# EAGLE board single_channel_-_Rev_C_-_panel (EAGLE 6.1)
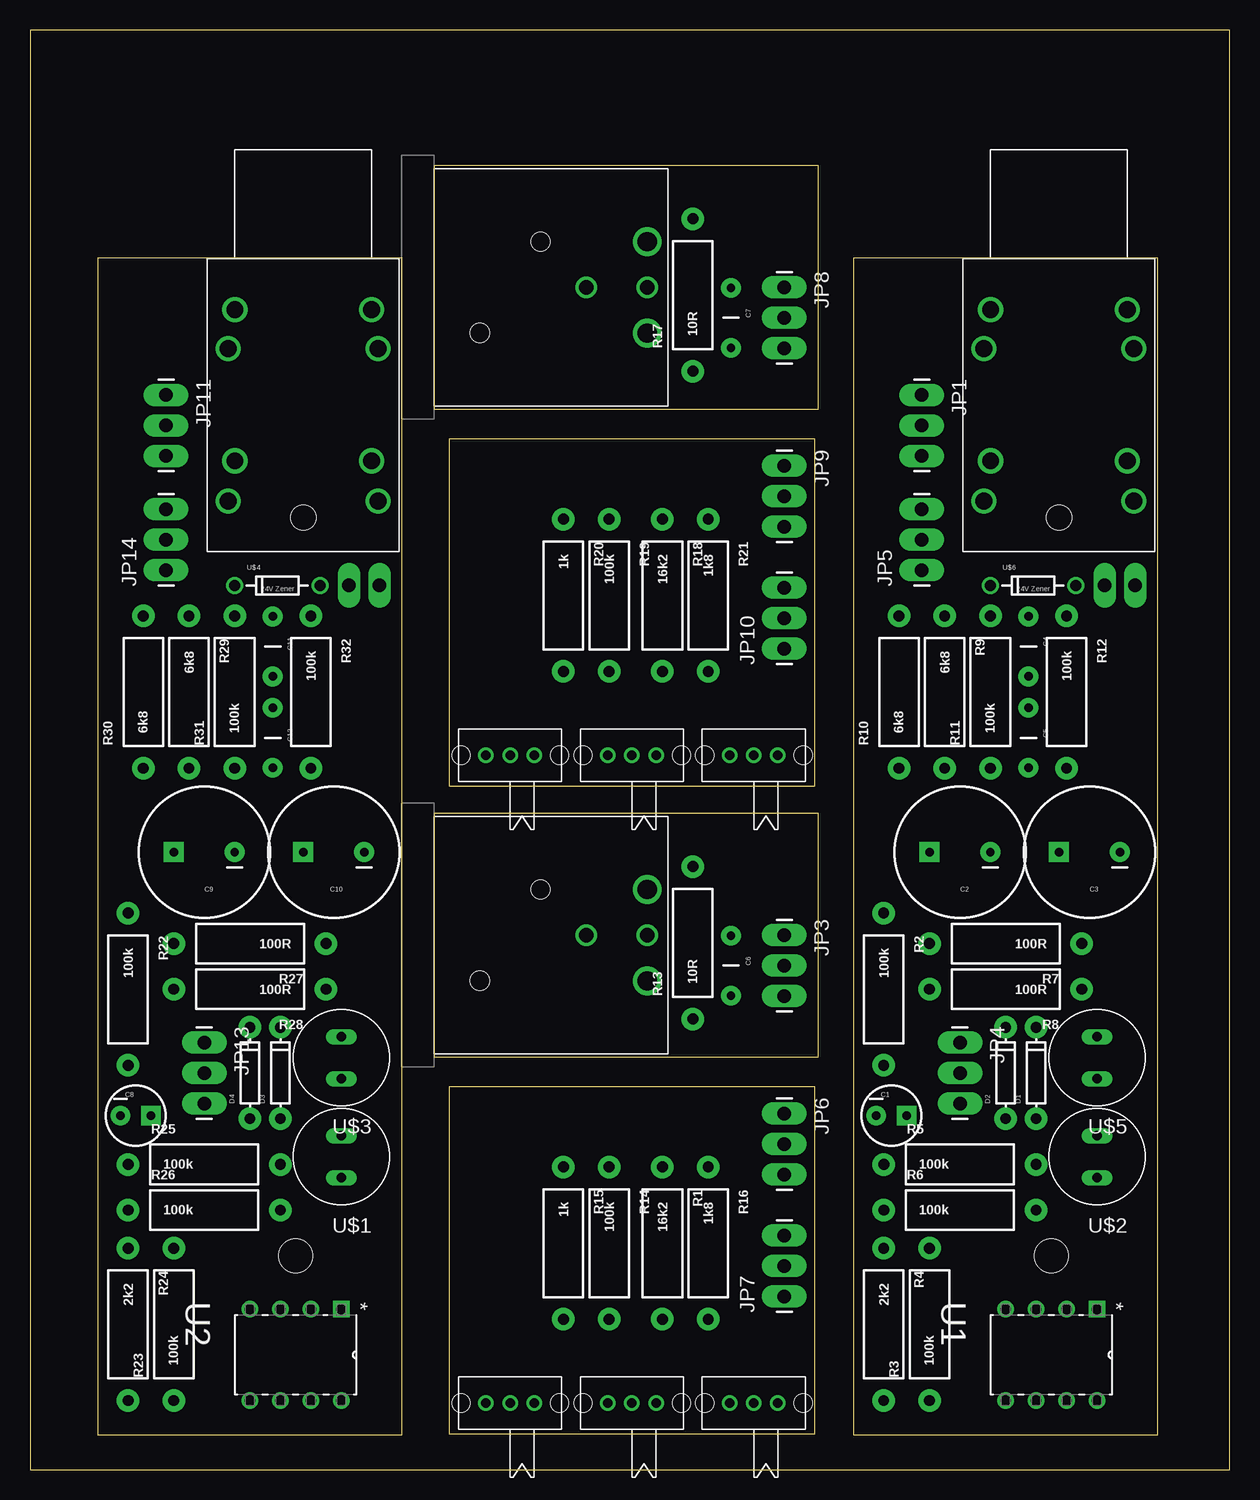
[diagram p0: board, top side]
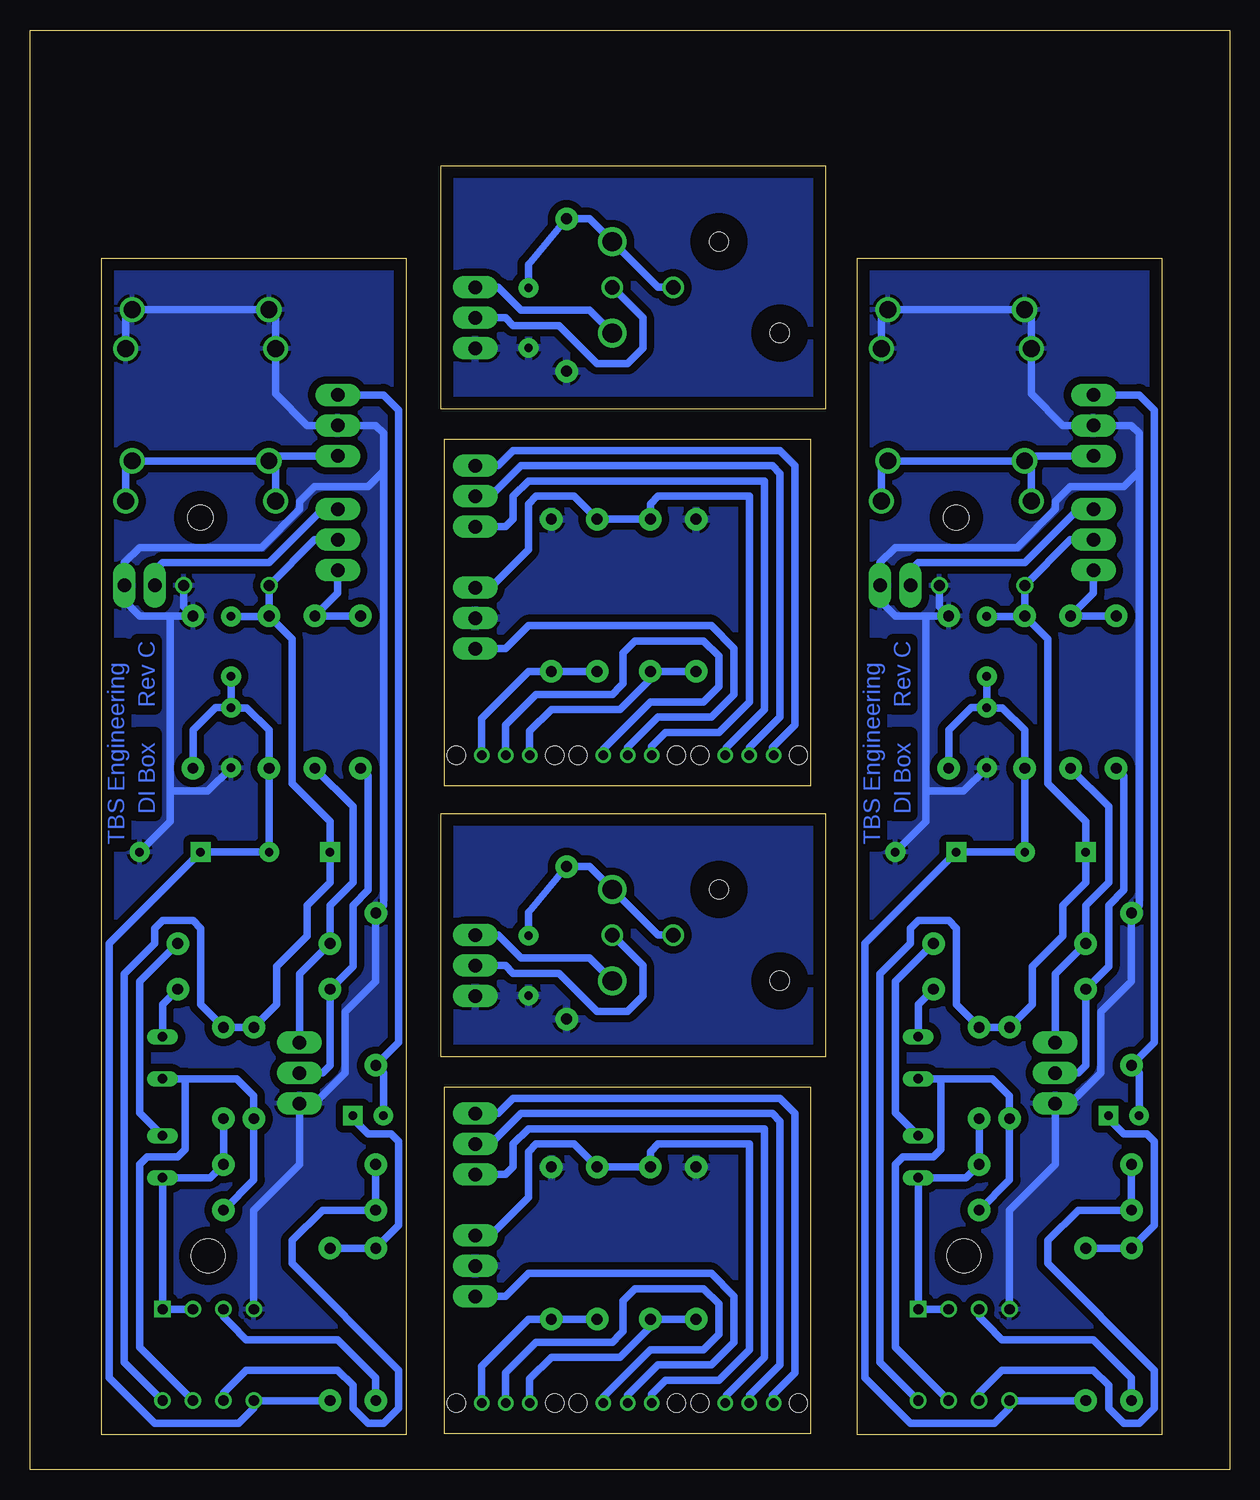
[diagram p1: board, bottom side, seen from below]

Size 100 x 120 mm. Coordinates in mm from the lower left corner, seen from the top.
Outline: 68.64,101 68.64,2.9 94.03,2.9 94.03,101 68.64,101
Outline: 33.67,34.38 65.73,34.38 65.73,54.7 33.67,54.7 33.67,34.38
Outline: 65.42,3 65.42,31.88 34.95,31.88 34.95,3 65.42,3
Outline: 0,0 100,0 100,120 0,120 0,0
Outline: 33.67,88.39 65.73,88.39 65.73,108.69 33.67,108.69 33.67,88.39
Outline: 65.42,57 65.42,85.88 34.95,85.88 34.95,57 65.42,57
Outline: 5.63,101 5.63,2.9 31.02,2.9 31.02,101 5.63,101
Copper layers (1*16): Top 0.035mm / dielectric 1.5mm / Bottom 0.035mm
Design rules: minimum track width 10mil, minimum drill 24mil, track to track 8mil, track to pad 8mil, pad to pad 8mil, via to via 8mil, smd to smd 8mil, copper to edge 40mil, drill to drill 8mil, minimum pad ring 10mil, minimum via ring 8mil, stop-mask expansion 4mil, vias tented up to drill 0mil, thermal gap 10mil
Holes 2.8 mm at 85.14,17.82 22.14,17.82
tKeepout: area 68.6,72.4 to 77.5,101; area 5.6,72.4 to 14.5,101

## Footprints (pad centres in the part's own frame; a part is rotated, then mirrored left to right if it is on the bottom)
CPOL-RADIAL-10UF-25V = drill 0.7 pad 1.651 square: 1 1.27,0 | drill 0.7 pad 1.651: 2 -1.27,0
CPOL-RADIAL-1000UF-25V = drill 0.7 pad 1.651 square: 1 2.54,0 | drill 0.7 pad 1.651: 2 -2.54,0
CAP-PTH-5MM = drill 0.7 pad 1.651: 1 -2.5,0; 2 2.5,0
DIODE-1N4148 = drill 0.9 pad 1.88: A -3.81,0; C 3.81,0
MHD = drill 1.4: 1 0,-5.7; 3 -12.6,-5.7; 4 0,5.7; 6 -12.6,5.7; 7 -3.25,-6.25; 9 -15.95,-6.25; 10 -3.25,6.25; 12 -15.95,6.25 | hole 2.1: -17.33,0
1X03_LONGPADS = drill 1.118 pad 1.88 long: 1 0,0; 2 2.54,0; 3 5.08,0
1X02_LONGPADS = drill 1.118 pad 1.88 long: 1 0,0; 2 2.54,0
AXIAL-0.5 = drill 0.9 pad 1.88: P$1 -6.35,0; P$2 6.35,0
SPDT-SLIDE = drill 0.787: 1 -2.007,0; 2 0,0; 3 2.007,0 | hole 1.499: -4.089,0; 4.115,0
DIP254P762X508-8 = drill 0.838 square: 1 -7.62,7.62 | drill 0.838: 2 -7.62,5.08; 3 -7.62,2.54; 4 -7.62,0; 5 0,0; 6 0,2.54; 7 0,5.08; 8 0,7.62
8MM = drill 0.8 long: P$1 0,1.75; P$2 0,-1.75
DIODE-ZENER = drill 0.9: P$1 -3.556,0; P$2 3.556,0
AC3MAH = drill 1.6: 1 3.81,-17.78; 2 -3.81,-17.78 | drill 1.2: 3 0,-17.78; G 0,-12.7 | hole 1.6: 3.81,-8.89; -3.81,-3.81

## Placement (x,y rotation side)
C1  [CPOL-RADIAL-10UF-25V]  71.81,29.5 0 top
C2  470uF  [CPOL-RADIAL-1000UF-25V]  77.53,51.47 180 top
C3  470uF  [CPOL-RADIAL-1000UF-25V]  88.32,51.47 180 top
C4  100nF  [CAP-PTH-5MM]  83.24,68.61 270 top
C5  100nF  [CAP-PTH-5MM]  83.24,60.99 270 top
C6  100nF  [CAP-PTH-5MM]  58.44,42.01 270 top
C7  100nF  [CAP-PTH-5MM]  58.44,96 270 top
C8  [CPOL-RADIAL-10UF-25V]  8.81,29.5 0 top
C9  470uF  [CPOL-RADIAL-1000UF-25V]  14.53,51.47 180 top
C10  470uF  [CPOL-RADIAL-1000UF-25V]  25.32,51.47 180 top
C11  100nF  [CAP-PTH-5MM]  20.24,68.61 270 top
C12  100nF  [CAP-PTH-5MM]  20.24,60.99 270 top
D1  [DIODE-1N4148]  83.88,33.05 90 top
D2  [DIODE-1N4148]  81.33,33.05 90 top
D3  [DIODE-1N4148]  20.88,33.05 90 top
D4  [DIODE-1N4148]  18.34,33.05 90 top
J1  ACJMMHD  [MHD]  85.78,96.68 90 top
J2  ACJMMHD  [MHD]  22.78,96.68 90 top
JP1  [1X03_LONGPADS]  74.35,89.57 270 top
JP2  [1X02_LONGPADS]  89.59,73.69 0 top
JP3  [1X03_LONGPADS]  62.88,44.55 270 top
JP4  [1X03_LONGPADS]  77.53,35.59 270 top
JP5  [1X03_LONGPADS]  74.35,74.97 90 top
JP6  [1X03_LONGPADS]  62.88,29.67 270 top
JP7  [1X03_LONGPADS]  62.88,14.43 90 top
JP8  [1X03_LONGPADS]  62.88,98.55 270 top
JP9  [1X03_LONGPADS]  62.88,83.67 270 top
JP10  [1X03_LONGPADS]  62.88,68.43 90 top
JP11  [1X03_LONGPADS]  11.35,89.57 270 top
JP12  [1X02_LONGPADS]  26.59,73.69 0 top
JP13  [1X03_LONGPADS]  14.53,35.59 270 top
JP14  [1X03_LONGPADS]  11.35,74.97 90 top
R1  16k2  [AXIAL-0.5]  52.73,18.88 270 top
R2  100k  [AXIAL-0.5]  71.17,40.04 270 top
R3  100k  [AXIAL-0.5]  74.98,12.1 90 top
R4  2k2  [AXIAL-0.5]  71.17,12.1 270 top
R5  100k  [AXIAL-0.5]  77.53,25.43 0 top
R6  100k  [AXIAL-0.5]  77.53,21.62 0 top
R7  100R  [AXIAL-0.5]  81.33,43.85 180 top
R8  100R  [AXIAL-0.5]  81.33,40.04 180 top
R9  6k8  [AXIAL-0.5]  76.25,64.81 270 top
R10  6k8  [AXIAL-0.5]  72.44,64.81 90 top
R11  100k  [AXIAL-0.5]  80.06,64.81 90 top
R12  100k  [AXIAL-0.5]  86.42,64.81 270 top
R13  10R  [AXIAL-0.5]  55.27,43.91 90 top
R14  100k  [AXIAL-0.5]  48.28,18.88 270 top
R15  1k  [AXIAL-0.5]  44.47,18.88 270 top
R16  1k8  [AXIAL-0.5]  56.53,18.88 270 top
R17  10R  [AXIAL-0.5]  55.27,97.91 90 top
R18  16k2  [AXIAL-0.5]  52.73,72.88 270 top
R19  100k  [AXIAL-0.5]  48.28,72.88 270 top
R20  1k  [AXIAL-0.5]  44.47,72.88 270 top
R21  1k8  [AXIAL-0.5]  56.53,72.88 270 top
R22  100k  [AXIAL-0.5]  8.18,40.04 270 top
R23  100k  [AXIAL-0.5]  11.98,12.1 90 top
R24  2k2  [AXIAL-0.5]  8.18,12.1 270 top
R25  100k  [AXIAL-0.5]  14.53,25.43 0 top
R26  100k  [AXIAL-0.5]  14.53,21.62 0 top
R27  100R  [AXIAL-0.5]  18.34,43.85 180 top
R28  100R  [AXIAL-0.5]  18.34,40.04 180 top
R29  6k8  [AXIAL-0.5]  13.26,64.81 270 top
R30  6k8  [AXIAL-0.5]  9.45,64.81 90 top
R31  100k  [AXIAL-0.5]  17.07,64.81 90 top
R32  100k  [AXIAL-0.5]  23.41,64.81 270 top
S1  SPDT  [SPDT-SLIDE]  60.34,5.54 0 top
S2  SPDT  [SPDT-SLIDE]  50.19,5.54 0 top
S3  SPDT  [SPDT-SLIDE]  40.02,5.54 0 top
S4  SPDT  [SPDT-SLIDE]  60.34,59.54 0 top
S5  SPDT  [SPDT-SLIDE]  50.19,59.54 0 top
S6  SPDT  [SPDT-SLIDE]  40.02,59.54 0 top
U1  TL072CP  [DIP254P762X508-8]  81.33,5.75 270 top
U2  TL072CP  [DIP254P762X508-8]  18.34,5.75 270 top
U$1  22uF  [8MM]  25.95,26.07 180 top
U$2  22uF  [8MM]  88.95,26.07 180 top
U$3  22uF  [8MM]  25.95,34.33 180 top
U$4  24V Zener  [DIODE-ZENER]  20.62,73.69 0 top
U$5  22uF  [8MM]  88.95,34.33 180 top
U$6  24V Zener  [DIODE-ZENER]  83.62,73.69 0 top
XLR1  AC3M  [AC3MAH]  33.67,44.55 90 top
XLR2  AC3M  [AC3MAH]  33.67,98.55 90 top

## Library data of the parts
C1 C4-C8 C11 C12 D1-D4 R1-R32 U$4 U$6 = SparkFun
C2 C3 C9 C10 = SparkFun-Passives
J1 J2 XLR1 XLR2 = con-audio
JP1-JP14 = SparkFun-Connectors
S1-S6 = switches
U1 U2 = ic-amplifiers; DESCRIPTION: OPERATIONAL AMPLIFIER; MPN: TL072CP; OC_FARNELL: 1106015; OC_NEWARK: 60K6988; PACKAGE: PDIP; SUPPLIER: Texas Instruments
U$1-U$3 U$5 = passive-capacitors

## Nets
1: JP6.1 S3.1
2: JP6.3 S3.3
3: JP9.1 S6.1
4: JP9.3 S6.3
GND: C3.2 C5.2 J1.1 J1.4 J1.7 J1.10 JP1.2 JP2.2 JP4.3 R2.P$1 R12.P$1 U1.4 U$6.P$2
GND1: C6.2 JP3.3 R13.P$1
GND2: JP7.2 R15.P$1 R16.P$1
GND3: C7.2 JP8.3 R17.P$1
GND4: JP10.2 R20.P$1 R21.P$1
GND5: C10.2 C12.2 J2.1 J2.4 J2.7 J2.10 JP11.2 JP12.2 JP13.3 R22.P$1 R32.P$1 U2.4 U$4.P$2
IN: JP7.3 R1.P$1 R14.P$1 S2.1
IN1: JP10.3 R18.P$1 R19.P$1 S5.1
MID: JP6.2 S3.2
MID1: JP9.2 S6.2
N$1: C6.1 R13.P$2 XLR1.1 XLR1.G
N$2: J1.3 J1.6 J1.9 J1.12 JP1.3
N$3: JP3.1 XLR1.2
N$4: JP3.2 XLR1.3
N$5: C1.2 JP1.1 R2.P$2
N$6: C1.1 R3.P$2 R4.P$1
N$7: D1.A R5.P$2 U1.1 U1.2 U$2.P$1
N$8: R4.P$2 U1.3
N$9: R5.P$1 R6.P$1 U1.6
N$10: C2.2 C3.1 C4.2 C5.1 R3.P$1 R11.P$1 R12.P$2 U1.5
N$11: C2.1 C4.1 D1.C D2.C JP5.2 R11.P$2 U1.8 U$6.P$1
N$12: D2.A R6.P$2 U1.7 U$5.P$1
N$13: JP4.2 R8.P$2 R10.P$1
N$14: JP5.1 R9.P$1 R10.P$2
N$15: JP4.1 R7.P$2 R9.P$2
N$16: R7.P$1 U$2.P$2
N$17: R8.P$1 U$5.P$2
N$18: R14.P$2 R15.P$2 S1.1
N$19: JP2.1 JP5.3
N$20: R1.P$2 R16.P$2 S1.3
N$21: S1.2 S2.3
N$22: C7.1 R17.P$2 XLR2.1 XLR2.G
N$23: JP8.2 XLR2.3
N$24: JP8.1 XLR2.2
N$25: R19.P$2 R20.P$2 S4.1
N$26: R18.P$2 R21.P$2 S4.3
N$27: S4.2 S5.3
N$28: J2.3 J2.6 J2.9 J2.12 JP11.3
N$29: C8.2 JP11.1 R22.P$2
N$30: C8.1 R23.P$2 R24.P$1
N$31: D3.A R25.P$2 U2.1 U2.2 U$1.P$1
N$32: R24.P$2 U2.3
N$33: R25.P$1 R26.P$1 U2.6
N$34: C9.2 C10.1 C11.2 C12.1 R23.P$1 R31.P$1 R32.P$2 U2.5
N$35: C9.1 C11.1 D3.C D4.C JP14.2 R31.P$2 U2.8 U$4.P$1
N$36: D4.A R26.P$2 U2.7 U$3.P$1
N$37: JP13.2 R28.P$2 R30.P$1
N$38: JP14.1 R29.P$1 R30.P$2
N$39: JP13.1 R27.P$2 R29.P$2
N$40: R27.P$1 U$1.P$2
N$41: R28.P$1 U$3.P$2
N$42: JP12.1 JP14.3
OUT: JP7.1 S2.2
OUT1: JP10.1 S5.2

## Tracks (layer width: path | path; a pad name or v marks a point on that pad's centre or on a via)
1
  Bottom 0.61: JP6.1 60.98,29.67 59.71,30.94 37.48,30.94 36.22,29.67 36.22,8.08 37.48,6.81 38.12,6.17 38.12,5.64 S3.1
2
  Bottom 0.61: JP6.3 60.34,24.59 59.71,25.23 59.71,27.13 58.44,28.4 38.76,28.4 38.76,9.35 41.93,6.17 41.93,5.64 S3.3
3
  Bottom 0.61: JP9.1 60.98,83.67 59.71,84.94 37.48,84.94 36.22,83.67 36.22,62.08 37.48,60.81 38.12,60.17 38.12,59.64 S6.1
4
  Bottom 0.61: JP9.3 60.34,78.59 59.71,79.22 59.71,81.13 58.44,82.4 38.76,82.4 38.76,63.35 41.93,60.17 41.93,59.64 S6.3
GND
  Bottom 0.61: 70.54,83.22 70.54,86.39 71.17,87.03 JP1.2 76.89,87.03 79.53,89.67 J1.10 79.53,96.13 J1.4 J1.1 92.03,96.13 J1.7 | 70.54,83.22 70.54,48.3 70.54,47.02 R2.P$1 71.17,40.67 73.72,38.13 73.72,33.05 76.25,30.52 JP4.3 77.53,25.43 81.33,21.62 U1.4 | 70.54,83.22 71.81,81.95 76.25,81.95 77.53,80.68 77.53,80.05 80.7,76.87 90.86,76.87 92.13,75.6 JP2.2 92.13,72.42 90.86,71.16 88.32,71.16 | U$6.P$2 87.18,71.92 R12.P$1 88.32,71.16 | C3.2 88.32,54.01 88.32,56.55 | 88.32,56.55 88.32,71.16 | C5.2 85.19,56.55 88.32,56.55
  pour Bottom (isolate 0.61): 68.64,101 68.64,3.21 94.03,3.21 94.03,101
GND1
  pour Bottom (isolate 0.61): 33.67,34.38 65.42,34.38 65.42,54.7 33.67,54.7
GND2
  pour Bottom (isolate 0.61): 65.42,3 65.42,32.21 34.95,32.21 34.95,3
GND3
  pour Bottom (isolate 0.61): 33.67,88.39 65.42,88.39 65.42,108.7 33.67,108.7
GND4
  pour Bottom (isolate 0.61): 65.42,57 65.42,86.21 34.95,86.21 34.95,57
GND5
  Bottom 0.61: 7.54,83.22 7.54,86.39 8.18,87.03 JP11.2 13.89,87.03 16.53,89.67 J2.10 16.53,96.13 J2.4 J2.1 29.03,96.13 J2.7 | 7.54,83.22 7.54,48.3 7.54,47.02 R22.P$1 8.18,40.67 10.71,38.13 10.71,33.05 13.26,30.52 JP13.3 14.53,25.43 18.34,21.62 U2.4 | 7.54,83.22 8.81,81.95 13.26,81.95 14.53,80.68 14.53,80.05 17.7,76.87 27.86,76.87 29.13,75.6 JP12.2 29.13,72.42 27.86,71.16 25.32,71.16 | U$4.P$2 24.18,71.92 R32.P$1 25.32,71.16 | C10.2 25.32,54.01 25.32,56.55 | 25.32,56.55 25.32,71.16 | C12.2 22.18,56.55 25.32,56.55
  pour Bottom (isolate 0.61): 5.63,101 5.63,3.21 31.04,3.21 31.04,101
IN
  Bottom 0.61: JP7.3 61.62,19.51 59.08,22.05 58.44,22.68 58.44,26.5 57.8,27.13 54.63,27.13 R1.P$1 R14.P$1 48.28,26.5 47.65,27.13 40.02,27.13 40.02,9.98 42.56,7.45 47.01,7.45 48.18,6.28 S2.1
IN1
  Bottom 0.61: JP10.3 61.62,73.51 59.08,76.05 58.44,76.69 58.44,80.5 57.8,81.13 54.63,81.13 R18.P$1 R19.P$1 48.28,80.5 47.65,81.13 40.02,81.13 40.02,63.98 42.56,61.45 47.01,61.45 48.18,60.28 S5.1
MID
  Bottom 0.61: JP6.2 61.62,27.13 59.08,29.67 38.12,29.67 37.48,29.04 37.48,8.71 40.02,6.17 S3.2
MID1
  Bottom 0.61: JP9.2 61.62,81.13 59.08,83.67 38.12,83.67 37.48,83.03 37.48,62.72 40.02,60.17 S6.2
N$1
  Bottom 0.61: XLR1.G 47.65,44.55 XLR1.1 53.36,50.26 R13.P$2 58.44,46.45 C6.1
N$2
  Bottom 0.61: J1.12 79.53,83.53 J1.6 | J1.9 92.03,83.53 J1.3 J1.6 | J1.6 79.67,84.49 JP1.3
N$3
  Bottom 0.61: XLR1.2 53.36,42.64 59.08,42.64 60.98,44.55 JP3.1
N$4
  Bottom 0.61: XLR1.3 48.91,42.01 48.91,39.47 50.19,38.2 52.73,38.2 55.9,41.37 59.71,41.37 60.34,42.01 JP3.2
N$5
  Bottom 0.61: JP1.1 70.54,89.57 69.27,88.3 69.27,48.93 69.27,35.59 R2.P$2 70.54,33.05 C1.2
N$6
  Bottom 0.61: C1.1 73.08,29.25 71.81,27.98 69.91,27.98 69.27,27.34 69.27,20.36 R4.P$1 R3.P$2
N$7
  Bottom 0.61: U1.2 U1.1 U$2.P$1 84.99,24.32 R5.P$2 D1.A
N$8
  Bottom 0.61: U1.3 83.88,12.73 83.24,12.1 81.97,10.83 74.35,10.83 71.17,7.66 R4.P$2
N$9
  Bottom 0.61: U1.6 83.88,6.38 81.97,8.29 74.35,8.29 73.08,7.02 73.08,5.12 71.81,3.85 70.54,3.85 69.27,5.12 69.27,8.29 78.16,17.18 78.16,19.09 75.62,21.62 R6.P$1 R5.P$1
N$10
  Bottom 0.61: C4.2 C5.1 | R12.P$2 86.42,61.63 84.51,63.53 83.28,63.53 C5.1 | C5.1 81.93,63.49 80.06,61.63 R11.P$1 C2.2 C3.1 93.4,43.85 93.4,7.66 89.59,3.85 82.61,3.85 81.33,5.12 U1.5 80.7,5.75 R3.P$1
N$11
  Bottom 0.61: JP5.2 76.25,77.5 U$6.P$1 R11.P$2 | C4.1 80.11,71.11 R11.P$2 | R11.P$2 78.16,69.25 78.16,57.19 74.98,54.01 C2.1 74.98,48.93 76.89,47.02 76.89,44.48 79.43,41.95 79.43,38.77 D2.C D1.C 85.78,38.77 85.78,45.12 86.42,45.76 88.95,45.76 89.59,45.12 89.59,44.48 89.59,43.85 92.13,41.31 92.13,40.67 92.13,8.93 U1.8
N$12
  Bottom 0.61: U$5.P$1 87.05,32.58 | 87.05,32.58 82.76,32.58 81.33,31.15 D2.A 81.33,24.16 R6.P$2 | U1.7 90.86,10.2 90.86,25.43 90.22,26.07 87.69,26.07 87.05,26.7 87.05,32.58
N$13
  Bottom 0.61: R10.P$1 71.81,57.82 71.81,48.3 73.08,47.02 73.08,41.95 R8.P$2 74.98,33.69 75.62,33.05 JP4.2
N$14
  Bottom 0.61: R10.P$2 R9.P$1 74.35,73.06 JP5.1
N$15
  Bottom 0.61: R9.P$2 73.08,55.28 73.08,48.93 74.98,47.02 R7.P$2 77.53,41.31 JP4.1
N$16
  Bottom 0.61: R7.P$1 90.86,40.67 90.86,31.15 90.86,29.73 U$2.P$2
N$17
  Bottom 0.61: U$5.P$2 88.95,38.77 R8.P$1
N$18
  Bottom 0.61: S1.1 58.34,7.55 56.53,9.35 50.82,9.35 48.28,11.89 R14.P$2 R15.P$2
N$19
  Bottom 0.61: JP2.1 89.59,74.97 88.95,75.6 80.06,75.6 75.62,80.05 JP5.3
N$20
  Bottom 0.61: S1.3 62.35,8.61 58.44,12.53 R16.P$2 R1.P$2
N$21
  Bottom 0.61: S1.2 60.34,8.08 57.8,10.62 51.45,10.62 50.82,11.26 50.57,11.51 50.57,14.05 50.19,14.43 49.55,15.06 43.84,15.06 42.56,13.79 42.56,11.26 43.84,9.98 48.28,9.98 52.19,6.07 S2.3
N$22
  Bottom 0.61: XLR2.G 47.65,98.55 XLR2.1 53.36,104.26 R17.P$2 58.44,100.45 C7.1
N$23
  Bottom 0.61: XLR2.3 48.91,96 48.91,93.47 50.19,92.19 52.73,92.19 55.9,95.37 59.71,95.37 60.34,96 JP8.2
N$24
  Bottom 0.61: XLR2.2 53.36,96.64 59.08,96.64 60.98,98.55 JP8.1
N$25
  Bottom 0.61: S4.1 58.34,61.55 56.53,63.35 50.82,63.35 48.28,65.89 R19.P$2 R20.P$2
N$26
  Bottom 0.61: S4.3 62.35,62.61 58.44,66.53 R21.P$2 R18.P$2
N$27
  Bottom 0.61: S4.2 60.34,62.08 57.8,64.62 51.45,64.62 50.82,65.25 50.57,65.51 50.57,68.05 50.19,68.43 49.55,69.06 43.84,69.06 42.56,67.8 42.56,65.25 43.84,63.98 48.28,63.98 52.19,60.07 S5.3
N$28
  Bottom 0.61: J2.12 16.53,83.53 J2.6 | J2.9 29.03,83.53 J2.3 J2.6 | J2.6 16.67,84.49 JP11.3
N$29
  Bottom 0.61: JP11.1 7.54,89.57 6.27,88.3 6.27,48.93 6.27,35.59 R22.P$2 7.54,33.05 C8.2
N$30
  Bottom 0.61: C8.1 10.08,29.25 8.81,27.98 6.91,27.98 6.27,27.34 6.27,20.36 R24.P$1 R23.P$2
N$31
  Bottom 0.61: U2.2 U2.1 U$1.P$1 21.99,24.32 R25.P$2 D3.A
N$32
  Bottom 0.61: U2.3 20.88,12.73 20.24,12.1 18.97,10.83 11.35,10.83 8.18,7.66 R24.P$2
N$33
  Bottom 0.61: U2.6 20.88,6.38 18.97,8.29 11.35,8.29 10.08,7.02 10.08,5.12 8.81,3.85 7.54,3.85 6.27,5.12 6.27,8.29 15.16,17.18 15.16,19.09 12.62,21.62 R26.P$1 R25.P$1
N$34
  Bottom 0.61: C11.2 C12.1 | R32.P$2 23.41,61.63 21.51,63.53 20.28,63.53 C12.1 | C12.1 18.93,63.49 17.07,61.63 R31.P$1 C9.2 C10.1 30.4,43.85 30.4,7.66 26.59,3.85 19.61,3.85 18.34,5.12 U2.5 17.7,5.75 R23.P$1
N$35
  Bottom 0.61: JP14.2 13.26,77.5 U$4.P$1 R31.P$2 | C11.1 17.11,71.11 R31.P$2 | R31.P$2 15.16,69.25 15.16,57.19 11.98,54.01 C9.1 11.98,48.93 13.89,47.02 13.89,44.48 16.43,41.95 16.43,38.77 D4.C D3.C 22.78,38.77 22.78,45.12 23.41,45.76 25.95,45.76 26.59,45.12 26.59,44.48 26.59,43.85 29.13,41.31 29.13,40.67 29.13,8.93 U2.8
N$36
  Bottom 0.61: U$3.P$1 24.05,32.58 | 24.05,32.58 19.76,32.58 18.34,31.15 D4.A 18.34,24.16 R26.P$2 | U2.7 27.86,10.2 27.86,25.43 27.23,26.07 24.68,26.07 24.05,26.7 24.05,32.58
N$37
  Bottom 0.61: R30.P$1 8.81,57.82 8.81,48.3 10.08,47.02 10.08,41.95 R28.P$2 11.98,33.69 12.62,33.05 JP13.2
N$38
  Bottom 0.61: R30.P$2 R29.P$1 11.35,73.06 JP14.1
N$39
  Bottom 0.61: R29.P$2 10.08,55.28 10.08,48.93 11.98,47.02 R27.P$2 14.53,41.31 JP13.1
N$40
  Bottom 0.61: R27.P$1 27.86,40.67 27.86,31.15 27.86,29.73 U$1.P$2
N$41
  Bottom 0.61: U$3.P$2 25.95,38.77 R28.P$1
N$42
  Bottom 0.61: JP12.1 26.59,74.97 25.95,75.6 17.07,75.6 12.62,80.05 JP14.3
OUT
  Bottom 0.61: S2.2 50.19,6.17 47.65,8.71 43.2,8.71 41.3,10.62 41.3,14.43 43.2,16.34 58.44,16.34 60.34,14.43 JP7.1
OUT1
  Bottom 0.61: S5.2 50.19,60.17 47.65,62.72 43.2,62.72 41.3,64.62 41.3,68.43 43.2,70.33 58.44,70.33 60.34,68.43 JP10.1

## Text on the board
Bottom: Rev C | Rev C | DI Box | DI Box | TBS Engineering | TBS Engineering